# Altium PCB Drude.PcbDoc (part 2 of 2)
Units mil, origin at the board's own origin, x right, y up, seen from the top; angles counter-clockwise.
Board outline 1811.02 x 2874.02 mil, 4 copper layers (Top Layer, GND, Supply, Bottom Layer), stack 59.85 mil thick; 137 components, 118 nets, 574 pads, 296 vias.
Unrouted connection lines stored in the file: 8.
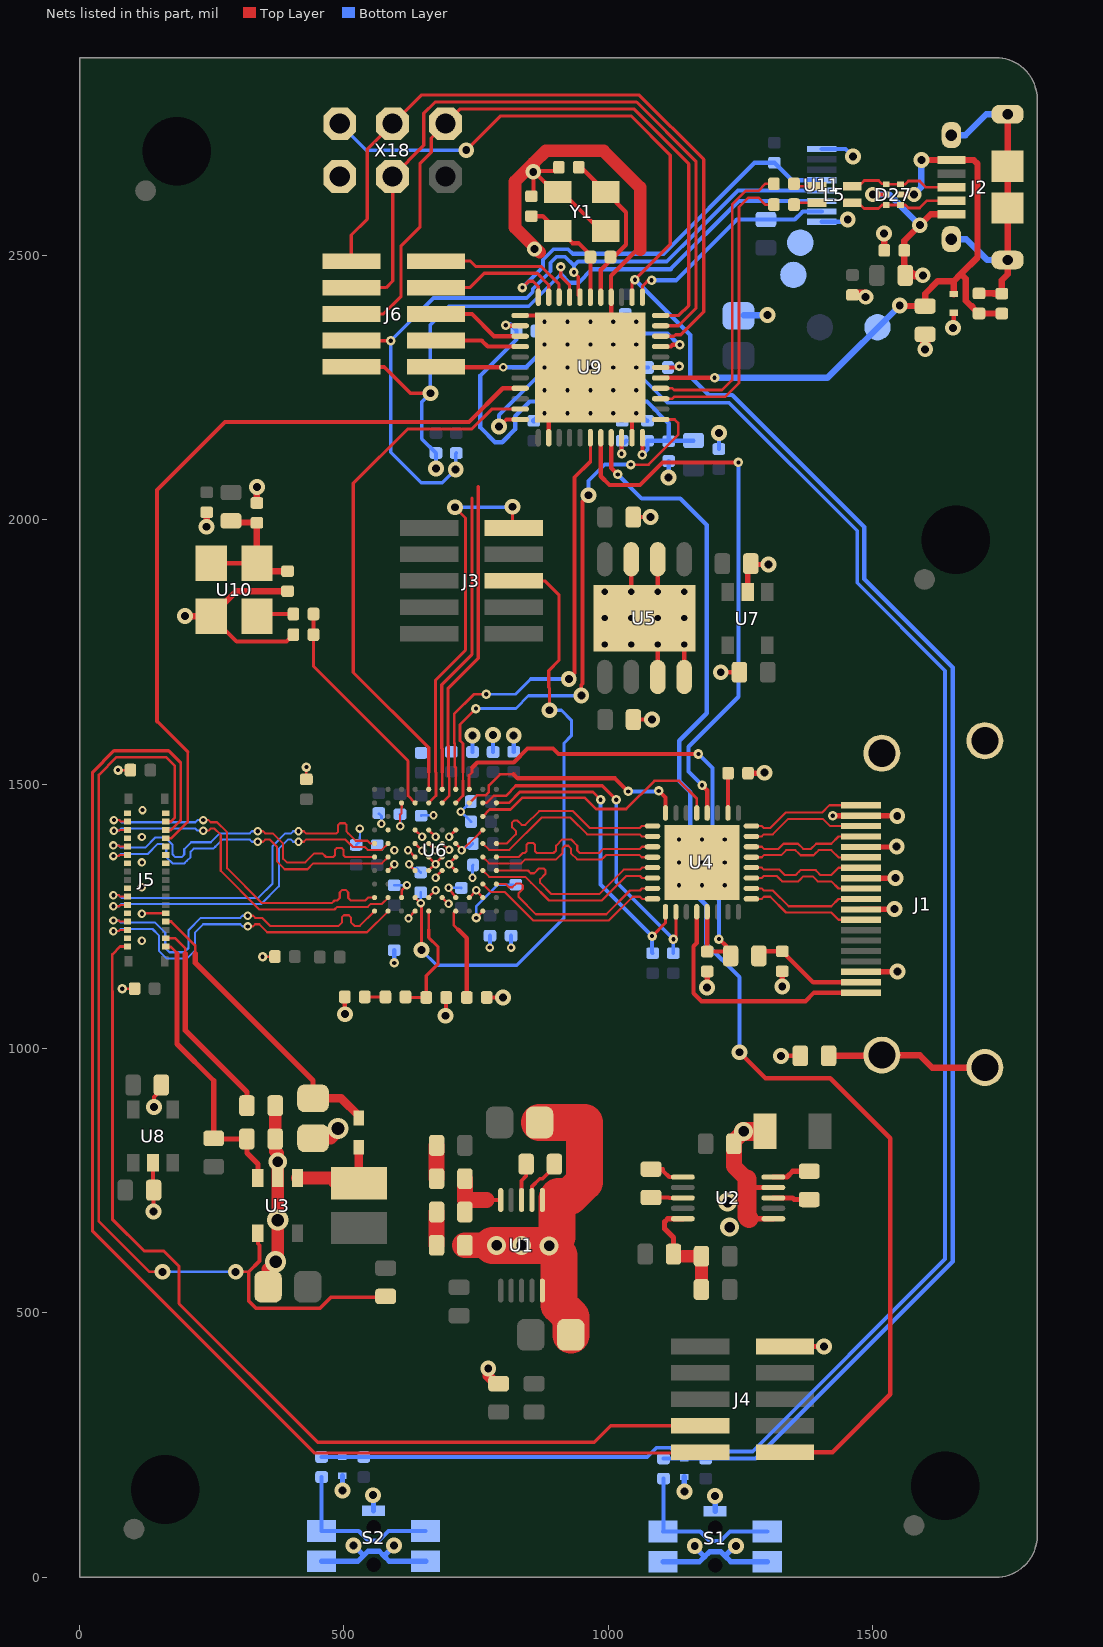
[diagram p4: the nets of this part, all layers, seen from the top]

## Via types
v1: diameter 30, hole 15, Top Layer to Bottom Layer, tented both sides, 88 vias
v2: diameter 16, hole 8, Top Layer to Bottom Layer, tented both sides, 66 vias
v3: diameter 18, hole 8, Top Layer to Bottom Layer, tented both sides, 62 vias
v4: diameter 19.68, hole 8, Top Layer to Bottom Layer, 34 vias
v5: diameter 29, hole 15, Top Layer to Bottom Layer, tented both sides, 24 vias
v6: diameter 26, hole 11.81, Top Layer to Bottom Layer, 12 vias
v7: diameter 36, hole 20, Top Layer to Bottom Layer, tented both sides, 6 vias
v8: diameter 40, hole 24, Top Layer to Bottom Layer, tented both sides, 3 vias
v9: diameter 35, hole 20, Top Layer to Bottom Layer, tented both sides, 1 vias

## Nets (pads, with @x,y where several pads share a name; then routed paths per layer and width w, separated by ;. In a path a pad name is that pad's centre, name@x,y a point inside that pad or via, vN(x,y) a via of type N, cw(c..) or ccw(c..) an arc to the next point about the centre after c; other vN are vias at no path point) (continued)
GND: C2.2 C3.2 C4.2 C5.2 C8.2 C9.2 C10.2 C11.2 C13.2 C14.2 C15.2 C16.1 C18.2 C19.2 C20.2 C21.2 C22.2 C23.2 C24.1 C25.2 C26.1 C27.1 C28.2 C29.1 C30.2 C31.1 C32.2 C33.1 C34.2 C35.1 C36.1 C37.2 C38.1 C39.2 C40.1 C41.2 C42.1 C43.1 C44.1 C45.2 C46.2 C47.1 C49.2 C50.2 C51.2 C52.2 C53.2 C54.2 C55.2 C56.2 C57.2 C58.2 C59.2 C60.2 C61.1 C62.2 C63.2 C64.2 C65.2 D2.C D3.C D13.C J1.2 J1.5 J1.8 J1.11 J1.17 J4.2 J5.3 J5.9 J5.10 J5.15 J5.21 J5.22 J5.26 J5.27 J5.33 J5.34 L4.1 L8.1 R6.1 R11.2 R12.2 R17.1 S1.3 S1.4 S1.5 S2.3 S2.4 S2.5 U1.5 U1.6 U2.1 U2.4 U3.2 U4.33 U5.3 U5.4 U5.6 U5.7 U5.9 U6.A7 U6.B2 U6.B3 U6.B4 U6.B5 U6.B6 U6.B8 U6.D4 U6.D5 U6.D6 U6.D7 U6.D9 U6.E4 U6.E5 U6.E6 U6.E7 U6.F4 U6.F5 U6.F6 U6.F7 U6.G2 U6.G4 U6.G6 U6.G7 U6.G9 U6.J8 U7.2 U8.2 U9.15 U9.23 U9.35 U9.43 U9.45 U10.2 U11.1 U11.8 X18.6 Y1.2 Y1.4 | length 7368.1
  Top Layer w4: v2@596.23,1349.41 v2@596.46,1349.41 ; v2(606.3,1420.28) 606.3,1442.3 609.02,1445.02 609.02,1456.24 ; v2(722.44,1375) 723.5,1375 736.39,1387.89 737.07,1387.89 756.68,1407.5
  Top Layer w5: v3(72.83,1526.57) C13.2@96.16,1526.57 ; v3(80.71,1113.19) C4.2@104.03,1113.19 ; v2(118,1255) 118.91,1255.91 J5.10@162.8,1255.91 ; v3(346.09,1173.51) C64.2@369.41,1173.51 ; C65.2@429,1509 v3(429,1532.32) ; U6.D9@583.43,1336.61 589.32,1342.5 ; 589.39,1342.34 v2@596.46,1349.41 ; U6.B8@609.02,1285.43 609.02,1298.98 v2(619.09,1309.06) ; 609.02,1456.24 U6.J8@609.02,1464.57 ; v2(621.06,1375) 621.82,1375 U6.E7@634.61,1362.2 ; v2(622.05,1246.06) 622.05,1247.28 U6.A7@634.61,1259.84 ; v2(623.03,1348.43) 622.8,1348.43 U6.D7@634.61,1336.61 ; U6.F7@634.61,1387.8 647.64,1374.77 v2(647.64,1374.02) ; U6.G7@634.61,1413.39 647.41,1400.59 v2(647.64,1400.59) ; U6.B6@660.2,1285.43 660.2,1286.19 v2(673.23,1299.21) ; U6.D6@660.2,1336.61 672.77,1349.18 v2@673.23,1349.18 ; U6.E6@660.2,1362.2 v2@673.23,1349.18 ; U6.F6@660.2,1387.8 673,1375 v2(673.23,1375) ; U6.G6@660.2,1413.39 673,1400.59 v2(673.23,1400.59) ; v2(673.23,1322.83) 673.23,1324.05 U6.D5@685.8,1336.61 ; U6.B5@685.8,1285.43 697.61,1273.62 v2(697.83,1273.62) ; U6.E5@685.8,1362.2 673.23,1349.64 v2@673.23,1349.18 ; U6.F5@685.8,1387.8 697.61,1375.98 v2(698.82,1375.98) ; v2(697.83,1304.13) U6.B4@711.39,1285.43 ; v2(698.82,1348.43) v2@698.82,1349.18 ; v2(698.82,1400.59) 698.82,1400.82 U6.G4@711.39,1413.39 ; U6.D4@711.39,1336.61 v2@698.82,1349.18 ; U6.E4@711.39,1362.2 698.82,1349.64 v2@698.82,1349.18 ; U6.F4@711.39,1387.8 722.44,1376.74 v2(722.44,1375) ; U6.B3@736.98,1285.43 750,1298.46 762.57,1285.89 U6.B2@762.57,1285.43 ; 756.68,1407.5 U6.G2@762.57,1413.39
  Top Layer w6: U6.D9@583.43,1336.61 U6.D9@583.66,1336.61
  Top Layer w8: U8.2@138.87,784.2 138.87,733.37 C20.2@139.96,732.28 v1(139.96,691.73) ; v1(140.75,889.76) 140.75,908.46 154.72,922.44 C21.2@154.72,931.1 ; U10.2@248.99,1817.74 297.05,1769.69 391.35,1769.69 R17.1@404.4,1782.74 ; C50.2@501.67,1097.6 501.67,1065.26 v1(501.97,1064.96) ; v1(691.93,1062.01) 693.21,1063.29 C51.2@693.21,1096.61 ; C49.2@769.98,1096.61 v1(801.02,1096.61) ; U9.23@833.13,2386.43 867.57,2386.43 v4(879.39,2374.61) v4(922.69,2331.31) v4(966,2288) ; C57.2@854.46,2611.78 858.4,2615.72 v5@858.4,2659.71 ; U9.35@887.26,2155.13 887.26,2209.26 v4(922.69,2244.69) v4(966,2288) ; C58.2@906.33,2666.6 899.44,2659.71 v5@858.4,2659.71 ; U9.45@966,2253.6 v4(966,2288) ; Y1.2@995.25,2546.14 985.75,2546.14 912.33,2619.56 898.55,2619.56 v5@858.4,2659.71 ; U5.7@1043.32,1925.22 v6(1043.32,1864) 1043.32,1839 U5.9@1068.32,1814 ; U9.43@1044.74,2155.13 1044.74,2209.26 v4(1009.31,2244.69) v4(966,2288) ; C2.2@1047.09,2005 v1(1079.65,2005) ; C3.2@1047.44,1622.05 v1(1082.68,1622.05) ; 1060.17,2512.35 1056.06,2512.35 1005,2461.28 1005,2421.24 U9.15@1005.37,2420.87 1005.37,2327.37 v4(966,2288) ; U5.3@1093.32,1702.78 v6(1093.32,1764) U5.9@1093.32,1789 ; U5.6@1093.32,1925.22 v6(1093.32,1864) 1093.32,1839 U5.9@1068.32,1814 ; U5.4@1143.32,1702.78 v6(1143.32,1764) 1118.32,1764 U5.9@1093.32,1789 ; v1(1212.6,1711.61) C19.2@1247.83,1711.61 ; 1265.75,678.15 1273.62,678.15 ; v1(1326.77,986.22) L8.1@1362.99,986.22 ; v1(1452.72,2567.67) v1@1455.71,2564.68 ; v1(1652,2363) 1654,2363 1653,2364 D3.C@1653,2391.28 ; U5.9@1068.32,1814 U5.9@1093.32,1789
  Top Layer w10: v1(1186.87,1115.29) C23.2@1186.87,1145.76 ; v1(1201.83,153.55) v1@1201.83,154.47 ; 1261.81,752.95 1277.56,737.2 U2.4@1312.01,737.2 ; U7.2@1263.48,1863.19 1263.48,1911.22 C18.2@1269.25,1916.99 1270.89,1915.35 v1(1303.15,1915.35) ; C22.2@1264.08,1520.67 1294.29,1520.67 v1(1295.28,1521.65) ; 1273.62,678.15 1286.37,678.15 U2.1@1312.01,678.15 ; v1(1328.87,1116.99) C24.1@1328.87,1146.06 ; J4.2@1333.86,436.61 v1(1408.07,436.61) ; v3(1424.32,1440.32) J1.2@1477.75,1440.32 1545.9,1440.32 v1(1546.26,1439.96) ; J1.17@1477.75,1145.05 1547.61,1145.05 v1(1546.98,1145.67) ; J1.11@1477.75,1263.16 1540.72,1263.16 v1(1541.34,1263.78) ; J1.8@1477.75,1322.21 1542.69,1322.21 v1(1543.31,1322.83) ; J1.5@1477.75,1381.27 1544.65,1381.27 v1(1545.28,1381.89)
  Top Layer w12: v1(199.3,1817.74) U10.2@248.99,1817.74 296.29,1865.04 C47.1@393.3,1865.04 ; v1(240.3,1986.74) C44.1@240.3,2014.04 ; C46.2@335.3,2031.74 v1(335.3,2061.74) ; v1(1521,2541) 1521,2536 1521.97,2535.03 C61.1@1521.97,2509.39
  Top Layer w20: v1(772.83,394.61) 772.42,394.19 772.42,381.24 787.4,366.26 C14.2@792.52,366.26 ; C62.2@1461.67,2425.14 1486.67,2425.14 v5(1486.67,2421.14) ; v5(1599,2322.31) L4.1@1599,2350.54
  Top Layer w24: C11.2@356.39,549.46 356.39,582.46 374.71,600.77 v8(374.71,675.44) U3.2@374.71,755.17 v9(374.71,785.68) 374.71,801.58 369.99,806.3 R12.2@369.99,828.99 R11.2@369.99,891.98 ; C9.2@441.64,830.35 474.64,830.35 488.89,844.6 v8(488.89,848.66) ; v5@858.4,2659.71 858.4,2674.47 ; v5@870.1,2506.14 823.46,2552.78 823.46,2639.54 858.4,2674.47 ; 1060.17,2511.17 1060.17,2628.5 991.08,2697.6 881.53,2697.6 858.4,2674.47
  Top Layer w30: v7(1255.91,843.5) 1237.4,825 C5.2@1237.4,819.88 1237.4,777.36 1261.81,752.95
  Top Layer w36: v7(1255.91,843.5) C8.2@1296.26,843.5 ; 1261.81,752.95 1261.81,682.09 1265.75,678.15
  Top Layer w48: R6.1@728.74,627.87 v7@780.71,627.87
  Top Layer w70: v7@780.71,627.87 v7(788.58,627.87) v7(835.83,627.87) v7@887.01,627.87 ; C10.2@869.89,860.16 954.6,860.16 954.6,747.75 926.58,719.73 905.81,719.73 902.43,716.35 902.43,643.29 v7@887.01,627.87 ; C45.2@928.94,458.58 928.94,492.55 906.54,514.95 906.54,608.34 v7(887.99,626.89) v7@887.01,627.87
  Bottom Layer w4: 530,1399.36 v2(530,1416) ; v2(570.87,1425.01) v2@570.87,1429.94 ; v2(606.3,1420.28) 606.3,1428.64 ; 610.36,1309.06 v2(619.09,1309.06) ; v2(623.03,1348.43) 630.23,1341.23 630.31,1341.23 ; v2@661.36,1440.94 v2(669.29,1440.94) ; v2(697.83,1304.13) 706.64,1304.13 ; v2(722.44,1375) 728.44,1381 729.5,1381 ; 727.63,1454.62 v2(721.01,1447.98) 721.32,1447.98 727.92,1441.38 ; v2(743.11,1322.83) 743.11,1331.64
  Bottom Layer w5: C28.2@523,1385 530,1392 530,1399.36 ; C27.1@566,1444.3 570.87,1439.43 v2@570.87,1429.94 ; C38.1@595,1308.7 595.36,1309.06 610.36,1309.06 ; C25.2@606,1443 606.3,1442.7 606.3,1428.64 ; 630.31,1341.23 636.77,1341.23 C52.2@645,1333 ; C42.1@646,1440.3 646.64,1440.94 v2@661.36,1440.94 ; 706.64,1304.13 721.57,1304.13 C26.1@722,1303.7 ; 727.63,1454.62 C30.2@740.01,1467 ; 727.92,1441.38 C31.1@740.3,1429 ; 729.5,1381 737.07,1381 C36.1@743.87,1387.8 ; 743.11,1331.64 743.11,1346.11 C34.2@744,1347
  Bottom Layer w8: v3(595,1162) C37.2@595,1186 ; C40.1@743,1560.7 v1(743,1592) ; v2(775.59,1190.94) 776,1191.35 C35.1@776,1213.3 ; C16.1@782,1560.7 v1(782,1593) ; v2(815.94,1190.94) 815.94,1213.24 C33.1@816,1213.3 ; C15.2@821,1561 v1(821,1592) ; v4@873.39,2201.39 v4(879.39,2201.39) ; v4(1009.31,2201.39) 1023.69,2187 C55.2@1026,2187 ; v4@1045.39,2374.61 v4@1046.39,2374.61 ; v4(1052.61,2288) C32.2@1075,2288 ; v4@1061.17,2198.83 1073,2187 C59.2@1074,2187 ; v1(1114,2080) C60.2@1114,2111 ; C43.1@1209,2133.7 v1(1209,2164) ; U11.8@1403.54,2563.39 1448.44,2563.39 v1(1452.72,2567.67) ; U11.1@1403.54,2701.18 1448.43,2701.18 v1(1462.6,2687.01) ; v4@1046.39,2374.61 v4(1052.61,2374.61) 1038.23,2389 C54.2@1032,2389 v4@1046.39,2374.61
  Bottom Layer w10: S2.4@457.57,30.35 526.43,30.35 537.4,41.32 ; v1(497.05,164.37) D2.C@497.05,191.93 ; v1(517.74,60.04) 518.68,60.04 537.4,41.32 ; v1(555.12,155.31) v1@556,154.43 ; S2.5@556,125.82 v1@556,149.5 ; v1(594.49,60.04) 594.49,58.83 575.79,40.13 ; S2.3@654.43,30.35 585.57,30.35 575.79,40.13 ; C53.2@859,2187 v4@873.39,2201.39 ; S1.4@1103.57,29.35 1172.43,29.35 1182.09,39 ; v1(1143.7,162.4) D13.C@1143.7,189.96 ; v1(1163.39,59.06) 1163.39,57.7 1182.09,39 ; v1(1201.83,153.55) 1201.83,155.11 v1@1202.98,156.27 ; S1.5@1202,124.82 v1@1202,150.36 ; v1(1241.2,59.06) 1241.05,59.06 1240.16,59.95 1220.56,40.35 ; S1.3@1300.43,29.35 1231.57,29.35 1220.56,40.35 ; 537.4,41.32 545.32,49.24 566.68,49.24 575.79,40.13 ; 1182.09,39 1191.32,48.24 1212.68,48.24 1220.56,40.35
  Bottom Layer w12: C63.2@1256,2387 v1(1301,2387)
  Bottom Layer w24: v8(488.89,848.66) v8@492.81,848.66
  other v2: 118,1204 750,1299.21 118,1305 595.47,1348.43 673.23,1348.43 118,1352 595.47,1375 118,1400 119,1451
  other v4: 1133.69,1308.69 1177,1308.69 1220.31,1308.69 1133.69,1352 1177,1352 1220.31,1352 1133.69,1395.31 1177,1395.31 1220.31,1395.31 922.69,2201.39 966,2201.39 1052.61,2201.39 879.39,2244.69 966,2244.69 1052.61,2244.69 879.39,2288 922.69,2288 1009.31,2288 879.39,2331.31 966,2331.31 1009.31,2331.31 1052.61,2331.31 922.69,2374.61 966,2374.61 1009.31,2374.61
  other v5: 860.28,2511.93 858,2658
  other v6: 993.32,1764 1043.32,1764 993.32,1814 1043.32,1814 1093.32,1814 1143.32,1814 993.32,1864 1143.32,1864
  other v7: 1229.33,662.4 1225.39,709.65
  other v8: 370.77,596.7
HDMI_CK_N: U4.8 U6.C2 | length 369.7
  Top Layer w4: U6.C2@762.57,1311.02 777.24,1296.35 803.68,1296.35 858.03,1242 1001,1242 1045.94,1286.94 1059.89,1286.94 1063.73,1283.1 U4.8@1083.5,1283.1
HDMI_CK_P: U4.7 U6.C1 | length 368.8
  Top Layer w4: U6.C1@788.16,1311.02 805.98,1311.02 812,1305 818.58,1305 825.52,1311.94 834.59,1311.94 838.03,1308.49 838.03,1301.82 830.03,1293.82 830.03,1286.97 863,1254 996.03,1254 1040.97,1298.94 1059.89,1298.94 1063.73,1302.79 U4.7@1083.5,1302.79
HDMI_CON_CK_N: J1.12 U4.17 | length 226.8
  Top Layer w4: U4.17@1270.5,1283.1 1290.27,1283.1 1294.11,1286.94 1306.06,1286.94 1335.84,1257.16 1421.66,1257.16 1435.35,1243.47 J1.12@1477.75,1243.47
HDMI_CON_CK_P: J1.10 U4.18 | length 226.8
  Top Layer w4: U4.18@1270.5,1302.79 1290.27,1302.79 1294.11,1298.94 1311.03,1298.94 1340.81,1269.16 1421.66,1269.16 1435.35,1282.84 J1.10@1477.75,1282.84
HDMI_CON_D0_N: J1.9 U4.19 | length 226.4
  Top Layer w4: U4.19@1270.5,1322.47 1290.27,1322.47 1294.11,1326.31 1318.69,1326.31 1325.27,1319.73 1328.79,1316.21 1359.18,1316.21 1362.7,1319.73 1368.49,1325.51 1386.7,1325.51 1396,1316.21 1421.66,1316.21 1435.35,1302.53 J1.9@1477.75,1302.53
HDMI_CON_D0_P: J1.7 U4.20 | length 226.4
  Top Layer w4: U4.20@1270.5,1342.16 1290.27,1342.16 1294.11,1338.31 1323.66,1338.31 1333.76,1328.21 1354.21,1328.21 1360,1334 1363.51,1337.51 1391.67,1337.51 1395.18,1334 1400.97,1328.21 1421.66,1328.21 1435.35,1341.9 J1.7@1477.75,1341.9
HDMI_CON_D1_N: J1.6 U4.21 | length 226.6
  Top Layer w4: U4.21@1270.5,1361.84 1290.27,1361.84 1294.11,1365.68 1326.66,1365.68 1336.24,1375.27 1353.73,1375.27 1360,1369 1363.51,1365.49 1388.19,1365.49 1391.7,1369 1397.97,1375.27 1421.66,1375.27 1435.35,1361.58 J1.6@1477.75,1361.58
HDMI_CON_D1_P: J1.4 U4.22 | length 226.6
  Top Layer w4: U4.22@1270.5,1381.53 1290.27,1381.53 1294.11,1377.68 1321.68,1377.68 1331.27,1387.27 1358.7,1387.27 1368.49,1377.49 1383.22,1377.49 1393,1387.27 1421.66,1387.27 1435.35,1400.95 J1.4@1477.75,1400.95
HDMI_CON_D2_N: J1.3 U4.23 | length 226.6
  Top Layer w4: U4.23@1270.5,1401.21 1290.27,1401.21 1294.11,1405.06 1311.03,1405.06 1340.29,1434.32 1405.68,1434.32 1419.36,1420.64 J1.3@1477.75,1420.64
HDMI_CON_D2_P: J1.1 U4.24 | length 226.6
  Top Layer w4: U4.24@1270.5,1420.9 1290.27,1420.9 1294.11,1417.06 1306.06,1417.06 1335.32,1446.32 1404.32,1446.32 1418.01,1460.01 J1.1@1477.75,1460.01
HDMI_D0_N: U4.6 U6.D2 | length 365.2
  Top Layer w4: U6.D2@762.57,1336.61 774.57,1324.61 843,1324.61 854,1313.61 887.61,1280 987.66,1280 1006.83,1299.17 1033.97,1326.31 1059.89,1326.31 1063.73,1322.47 U4.6@1083.5,1322.47
HDMI_D0_P: U4.5 U6.D1 | length 369.9
  Top Layer w4: U6.D1@788.16,1336.61 847.97,1336.61 853,1331.58 859.58,1331.58 868.52,1340.52 877.59,1340.52 881.03,1337.08 881.03,1330.4 871.03,1320.4 871.03,1313.56 892.58,1292 982.69,1292 1029,1338.31 1059.89,1338.31 1063.73,1342.16 U4.5@1083.5,1342.16
HDMI_D1_N: U4.4 U6.E2 | length 365.8
  Top Layer w4: U6.E2@762.57,1362.2 774.57,1350.2 835.44,1350.2 842.94,1357.71 901.23,1357.71 913.14,1369.62 913.14,1378.62 918.03,1383.5 924.26,1383.5 929.14,1378.62 929.14,1369.62 941.06,1357.71 987.63,1357.71 991.14,1361.22 995.61,1365.68 1059.04,1365.68 1062.88,1361.84 U4.4@1083.5,1361.84
HDMI_D1_P: U4.3 U6.E1 | length 365.8
  Top Layer w4: U6.E1@788.16,1362.2 830.47,1362.2 837.97,1369.71 842,1369.71 845.2,1372.91 845.2,1385.51 848.4,1388.71 858,1388.71 861.2,1385.51 861.2,1372.91 864.4,1369.71 896.26,1369.71 901.14,1374.59 901.14,1383.59 913.06,1395.5 929.23,1395.5 941.14,1383.59 941.14,1374.59 946.03,1369.71 982.66,1369.71 990.64,1377.68 1059.89,1377.68 1063.73,1381.53 U4.3@1083.5,1381.53
HDMI_D2_N: U4.2 U6.F2 | length 366.1
  Top Layer w4: U6.F2@762.57,1387.8 774.57,1375.8 812.8,1375.8 874,1437 928.03,1437 959.97,1405.06 1059.04,1405.06 1062.88,1401.21 U4.2@1083.5,1401.21
HDMI_D2_P: U4.1 U6.F1 | length 365.2
  Top Layer w4: U6.F1@788.16,1387.8 807.82,1387.8 825.03,1405 825.03,1411.58 818.09,1418.52 818.09,1427.59 821.54,1431.03 828.21,1431.03 836.21,1423.03 843.06,1423.03 869.03,1449 933,1449 964.94,1417.06 1059.04,1417.06 1062.88,1420.9 U4.1@1083.5,1420.9
I2C_SCL: J6.7 R33.1 U6.J5 U9.18 U11.5 | length 2125.5
  Top Layer w5: U6.J5@685.8,1464.57 699,1477.77 699,1513 697.83,1514.17
  Top Layer w6: 697.83,1514.17 697.83,1572.11 697,1572.95 697,1681.25 753.94,1738.19 753.94,2062.65 ; v3(935,2468) 943,2460 943,2424.19 U9.18@946.32,2420.87
  Top Layer w7: J6.7@514.08,2339 514.5,2338.58 v3(588.58,2338.58)
  Bottom Layer w7: R33.1@712.39,2126.1 711.31,2125.02 v1(711.31,2095.24) 686.06,2070 646,2070 588.58,2127.42 v3(588.58,2338.58) 669.5,2419.5 845.53,2419.5 856.96,2430.92 856.96,2436.38 890.5,2469.92 890.5,2486.08 901.92,2497.5 918.08,2497.5 935,2480.58 ; v3(935,2468) 935,2480.58 ; 1140,2518 1110.36,2488.36 942.78,2488.36 935,2480.58
  Bottom Layer w8: 1140.35,2517.65 1245.15,2622.44 U11.5@1403.54,2622.44
I2C_SDA: J6.9 R21.1 U6.K5 U9.19 U11.6 | length 1963.4
  Top Layer w5: U6.K5@685.8,1490.16 685.8,1522
  Top Layer w6: 685.8,1522 685.8,1567.18 685,1567.98 685,1687.95 741.94,1744.89 741.94,2040.7 ; v3(910,2478) 910,2460.38 926.63,2443.75 U9.19@926.63,2420.87
  Top Layer w7: J6.9@514.08,2289 576.16,2289 625.98,2239.17 v1(663.39,2239.17) ; v1(673.89,2097.24) v1@673.89,2098.85
  Bottom Layer w7: v1(673.89,2097.24) 673.89,2125.99 647,2152.88 647,2222.79 v1(663.39,2239.17) 663.39,2368.11 698.82,2403.54 849.38,2403.54 910,2464.17 v3(910,2478)
  Bottom Layer w8: 910,2464.17 926.17,2448 943.28,2448 969.14,2473.86 1117.78,2473.86 1246.68,2602.76 U11.6@1403.54,2602.76
INT: R22.1 U9.12 U11.7 | length 418.3
  Top Layer w6: U9.12@1064.43,2420.87 1064.43,2441.17 1069.25,2445.99 1069.25,2446.25 1075.76,2452.76 v3(1081.69,2452.76)
  Bottom Layer w8: v3(1081.69,2452.76) 1127.95,2452.76 1242.97,2567.77 R22.1@1298,2567.77 1352.46,2567.77 1367.76,2583.07 U11.7@1403.54,2583.07
IR: J3.2 U6.J6 | length 747.9
  Top Layer w5: U6.J6@660.2,1464.57 674,1478.36 674,1522 673,1523
  Top Layer w6: 673,1523 673,1696.62 729.94,1753.56 729.94,2003.33 v1(709.65,2023.62) ; v1(818.9,2024.61) 818.9,1986.45 J3.2@820.92,1984.43
  Bottom Layer w7: v1(709.65,2023.62) 817.91,2023.62 v1(818.9,2024.61)
LANE0_N: J5.11 U6.F9 | length 657.3
  Top Layer w4: v2(64,1269) 75,1269 77.65,1271.65 J5.11@90.75,1271.65 ; v2(414,1391) 424,1391 428,1395 503.03,1395 517.03,1381 539.59,1381 544.8,1375.8 571.43,1375.8 U6.F9@583.43,1387.8
  Bottom Layer w4: v2(64,1269) 74,1269 78,1273 343,1273 377,1307 377,1378.03 393.97,1395 400,1395 404,1391 v2(414,1391)
LANE0_P: J5.13 U6.F10 | length 657.9
  Top Layer w4: v2(64,1290) 74,1290 76.6,1287.4 J5.13@90.75,1287.4 ; v2(414,1411) 424,1411 428,1407 485.8,1407 489,1410.2 489,1422.8 492.2,1426 501.8,1426 505,1422.8 505,1410.2 508.2,1407 ; 508,1407 522,1393 544.56,1393 549.77,1387.8 U6.F10@557.84,1387.8
  Bottom Layer w4: v2(64,1290) 74,1290 79,1285 338.03,1285 365,1311.97 365,1383 389,1407 400,1407 404,1411 v2(414,1411)
LANE1_N: J5.23 U6.E9 | length 659.5
  Top Layer w4: v2(64,1364) 74,1364 76.14,1366.14 J5.23@90.75,1366.14 ; v2(337,1391) 347,1391 351,1395 360.03,1395 373,1382.03 373,1354 388,1339 431,1339 442.2,1350.2 571.43,1350.2 U6.E9@583.43,1362.2
  Bottom Layer w4: v2(64,1364) 74,1364 78,1368 128.97,1368 147.97,1387 157.03,1387 164,1380.03 164,1362.03 176.03,1350 198,1350 202.97,1354.97 210,1362 210,1372.03 215.97,1378 253,1378 256.51,1381.51 270,1395 322,1395 326,1391 v2(337,1391)
LANE1_P: J5.25 U6.E10 | length 659.8
  Top Layer w4: v2(64,1384) 74,1384 76.11,1381.89 J5.25@90.75,1381.89 ; v2(337,1411) 347,1411 351,1407 365,1407 385,1387 385,1358.97 391.97,1352 427.03,1352 444.03,1369 459.2,1369 466,1362.2 479.8,1362.2 483,1365.4 483,1375.8 486.2,1379 495.8,1379 499,1375.8 499,1365.4 502.2,1362.2 U6.E10@557.84,1362.2
  Bottom Layer w4: v2(64,1384) 74,1384 78,1380 124,1380 143,1399 162,1399 176,1385 176,1367 181,1362 193.03,1362 198,1366.97 198,1377 211,1390 248.03,1390 265.03,1407 322,1407 326,1411 v2(337,1411)
LANE2_N: J5.29 U6.B9 | length 662.2
  Top Layer w4: v2(65,1412) 75,1412 76.39,1413.39 J5.29@90.75,1413.39 ; v2(234,1412) 244,1412 248,1416 255,1416 267,1404 267,1336.03 340.03,1263 482.2,1263 487.2,1268 544.97,1268 549.97,1273 571,1273 U6.B9@583.43,1285.43
  Bottom Layer w4: v2(65,1412) 75,1412 79,1416 219,1416 223,1412 v2(234,1412)
LANE2_P: J5.31 U6.B10 | length 661.1
  Top Layer w4: v2(65,1432) 75,1432 77.87,1429.13 J5.31@90.75,1429.13 ; v2(234,1432) 244,1432 248,1428 259.97,1428 279,1408.97 279,1341 345,1275 477.23,1275 482.23,1280 487.2,1280 492,1284.8 492,1295.2 496.8,1300 503.2,1300 508,1295.2 508,1284.8 512.8,1280 540,1280 545.43,1285.43 U6.B10@557.84,1285.43
  Bottom Layer w4: v2(65,1432) 75,1432 79,1428 219,1428 223,1432 v2(234,1432)
LANE3_N: J5.5 U6.A9 | length 661.9
  Top Layer w4: v2(64,1222) 74,1222 76.41,1224.41 J5.5@90.75,1224.41 ; v2(318,1231) 328,1231 332,1235 340,1235 355,1220 543.59,1220 U6.A9@583.43,1259.84
  Bottom Layer w4: v2(64,1222) 74,1222 78.06,1226.06 137.94,1226.06 150,1214 150,1185 165,1170 202.97,1170 218,1185.03 218,1219 234,1235 304,1235 308,1231 v2(318,1231)
LANE3_P: J5.7 U6.A10 | length 658.9
  Top Layer w4: v2(63.98,1242.13) 73.98,1242.13 75.94,1240.16 J5.7@90.75,1240.16 ; v2(318,1251) 328,1251 332,1247 345,1247 360,1232 490,1232 496,1238 496,1248 500,1252 509,1252 513,1248 513,1239 520,1232 530,1232 U6.A10@557.84,1259.84
  Bottom Layer w4: v2(63.98,1242.13) 73.98,1242.13 78.04,1238.06 142.91,1238.06 162,1218.97 162,1189.97 169.97,1182 198,1182 206,1190 206,1223.97 229.03,1247 304,1247 308,1251 v2(318,1251)
LCD-ID-DET1: J5.24
LED-A: C9.1 D1.C J5.8 | length 561.5
  Top Layer w5: J5.8@162.8,1240.16 173.23,1240.16 218.5,1194.88 218.5,1178.13
  Top Layer w10: 218.5,1179.13 218.5,1162.4 441.64,939.27 C9.1@441.64,905.76
  Top Layer w16: C9.1@441.64,905.76 494.85,905.76 528.25,872.35 D1.C@528.25,868.35
LED-K1: J5.2 R10.1 R12.1 U3.3 | length 551.4
  Top Layer w5: J5.2@162.8,1191.91 172.69,1191.91 184.06,1180.55 184.06,1178.13
  Top Layer w10: 184.06,1179.13 184.06,1008.57 253.65,938.98 R10.1@253.65,830.16 ; R10.1@253.65,828.99 R12.1@316.44,828.99 316.44,802.65 337.31,781.79 U3.3@337.31,755.17
LED-K2: J5.4 R11.1 | length 390.5
  Top Layer w5: J5.4@162.8,1208.66 180.12,1208.66 200.06,1188.72 ; 200.06,1178.13 200.06,1187.72
  Top Layer w10: 200.06,1179.13 200.06,1034.2 316.44,917.81 R11.1@316.44,891.98
LED-PWM: J5.32 R13.2 U3.4 | length 1861.3
  Top Layer w5: v1(156.5,577.76) 131.89,577.76 36.42,673.23 36.42,1517.72 69.88,1551.18 163.39,1551.18 180.12,1534.45 180.12,1436.57 172.69,1429.13 ; v1(295.28,577.76) 319.87,577.76
  Top Layer w6: J5.32@162.8,1429.13 172.69,1429.13
  Top Layer w7: U3.4@337.31,650.83 337.31,631.1 340.27,628.14 340.27,598.15 319.89,577.78 319.89,522.72 333.66,508.96 454.53,508.96 475.36,529.79 R13.2@578.74,529.79
  Bottom Layer w5: v1(156.5,577.76) v1(295.28,577.76)
NetC1_1: C1.1 U1.7 | length 88.7
  Top Layer w7: U1.7@855.51,713.5 855.51,739.14 870.23,753.86 875.59,753.86 898.03,776.3 C1.1@898.03,781.42
NetC1_2: C1.2 U1.8 | length 71.5
  Top Layer w7: U1.8@835.83,713.5 835.83,750.07 844.49,758.73 C1.2@844.49,781.42
NetC6_1: C6.1 U2.3 | length 69.2
  Top Layer w10: U2.3@1312.01,717.52 1348.43,717.52 1351.57,714.37 C6.1@1379.92,714.37
NetC6_2: C6.2 U2.5 | length 72.5
  Top Layer w10: U2.5@1312.01,756.89 1337.65,756.89 1348.67,767.91 C6.2@1379.92,767.91
NetC7_1: C7.1 U2.8 | length 60.4
  Top Layer w8: C7.1@1080.71,718.31 1114.32,718.31 1115.11,717.52 U2.8@1140.75,717.52
NetC7_2: C7.2 U2.6 | length 68.1
  Top Layer w8: C7.2@1080.71,771.85 1103.39,771.85 1103.39,768.61 1115.11,756.89 U2.6@1140.75,756.89
NetC12_1: C12.1 R7.2 R8.2 U2.10 | length 201.8
  Top Layer w10: R7.2@1123.23,611.22 1123.23,642.52 1106.3,659.45 1106.3,672.24 1112.2,678.15 U2.10@1140.75,678.15
  Top Layer w24: 1142.05,607.28 R8.2@1175.98,607.28 1175.98,584.6 C12.1@1175.98,544.29
NetC22_1: C22.1 U4.26 | length 75.2
  Top Layer w8: U4.26@1226.21,1445.5 1226.21,1520.5 C22.1@1226.38,1520.67
NetC23_1: C23.1 L3.1 U4.13 U6.K3 | length 1009.3
  Top Layer w5: U6.K3@736.98,1490.16 736.5,1490.63 736.5,1516.5 742,1522
  Top Layer w6: 742,1522 742,1531
  Top Layer w8: 742,1531 752,1541 821,1541 847.34,1567.34 895.26,1567.34 905.6,1557 v3(1170.36,1557) ; C23.1@1186.87,1183.46 L3.1@1222.84,1183.46 ; C23.1@1186.84,1183.5 U4.13@1186.84,1258.5 ; v3(1209,1207) 1209.46,1207 1222.84,1193.62 L3.1@1222.84,1183.46 ; L3.1@1231.1,1175.2 L3.1@1222.84,1183.46
  Bottom Layer w8: v3(1170.36,1557) 1196.69,1530.68 1196.69,1293.31 1209,1281 v3(1209,1207)
NetC24_2: C24.2 J1.18 L3.2 | length 220.8
  Top Layer w8: L3.2@1284.65,1175.2 1293.21,1183.76 C24.2@1328.87,1183.76 1387.27,1125.36 J1.18@1477.75,1125.36
NetC32_1: C32.1 U9.6 | length 49.8
  Top Layer w8: U9.6@1098.87,2288 1132,2288 v3(1134,2290)
  Bottom Layer w8: C32.1@1119.54,2290 v3@1128.7,2290 ; v3@1129.7,2291 1130.7,2290 v3(1134,2290)
NetC46_1: C46.1 C47.2 L6.1 U10.1 U10.4 | length 271.1
  Top Layer w8: U10.1@248.99,1917.74 334.99,1917.74 U10.4@335.3,1918.05
  Top Layer w12: L6.1@286.3,1997.97 L6.1@290.23,1994.04 ; L6.1@297.6,1994.74 335.3,1994.74 C46.1@335.3,1994.04 ; C46.1@335.6,1993.74 C46.1@335.3,1994.04 ; C47.2@393.3,1902.74 350.61,1902.74 U10.4@335.61,1917.74 335.3,1918.05 C46.1@335.3,1994.04
NetC49_1: C49.1 U6.A4 | length 175.1
  Top Layer w5: U6.A4@711.39,1259.84 707.5,1255.96 707.5,1233.5 716,1225
  Top Layer w8: 716,1225 732.28,1208.72 C49.1@732.28,1096.61
NetC50_1: C50.1 R18.2 | length 39.1
  Top Layer w6: C50.1@539.37,1097.6 R18.2@578.44,1097.6
NetC51_1: C51.1 R18.1 U6.A6 | length 219.5
  Top Layer w5: 660.2,1225 U6.A6@660.2,1259.84
  Top Layer w6: R18.1@616.34,1097.6 617.32,1096.61 C51.1@655.51,1096.61 655.51,1137.8 678,1160.28 678,1192 660.2,1209.8 660.2,1225
NetC55_1: C55.1 U9.42 | length 58.2
  Top Layer w8: v3(1025,2125) 1025.06,2125.06 U9.42@1025.06,2155.13
  Bottom Layer w8: v3(1025,2125) 1025,2140.31 C55.1@1034,2149.31
NetC56_1: C56.1 C59.1 C60.1 L2.1 U9.24 U9.44 | length 881
  Top Layer w8: v3(806,2368) 806,2367 806.26,2366.74 U9.24@833.13,2366.74 ; v3@1064.43,2123.03 U9.44@1064.43,2155.13
  Bottom Layer w8: v3(806,2368) 810.63,2368 811.63,2367 814.47,2369.83 826.3,2358 C56.1@826.3,2357 826.3,2341.06 757.87,2272.64 757.87,2174.21 785.43,2146.65 799.21,2146.65 823.82,2171.26 823.82,2195.87 851.38,2223.43 1072.83,2223.43 1114,2182.26 C60.1@1114,2149.3 ; v3(1063.98,2123.03) 1074,2133.06 C59.1@1074,2149.3 C60.1@1114,2149.3 ; C60.1@1114,2148.7 C60.1@1114,2149.3 ; L2.1@1161,2149.3 C60.1@1114,2149.3
NetC57_1: C57.1 R72.1 U9.17 Y1.1 | length 222.9
  Top Layer w8: C57.1@854.46,2574.08 876.03,2574.08 Y1.1@903.97,2546.14 908.97,2546.14 932.1,2523.02 943.64,2523.02 968.79,2497.87 R72.1@968.79,2496.87 ; U9.17@966,2420.87 R72.1@966,2496.87
NetC58_1: C58.1 R72.2 U9.16 Y1.3 | length 304.8
  Top Layer w8: C58.1@944.03,2666.6 948.21,2666.6 Y1.3@995.25,2619.56 1033.25,2581.56 1033.25,2520.17 985.69,2472.6 U9.16@985.69,2420.87
NetC61_2: C61.2 D27.5 J2.1 L7.2 | length 356.3
  Top Layer w8.1: v5@1500,2616 1503,2616 1503,2615 D27.5@1525.73,2615
  Top Layer w12: L7.2@1561.44,2462.14 1579.01,2462.14 1559.67,2481.48 C61.2@1559.67,2509.39 1559.67,2527.67 v1(1589,2557) 1609.82,2577.82 J2.1@1648.7,2577.82
  Top Layer w16: 1579.01,2462.14 v5(1594.67,2462.14)
  Bottom Layer w12: v5(1500,2615) 1531,2615 v1(1589,2557)
NetD1_A: D1.A L1.2 U3.1 | length 188.1
  Top Layer w16: L1.2@528.25,745.32 D1.A@528.25,813.24
  Top Layer w24: U3.1@412.11,755.17 475.15,755.17 484.99,745.32 L1.2@528.25,745.32
NetJ1_19: J1.19 U4.12 | length 486.5
  Top Layer w8: U4.12@1167.16,1258.5 1167.16,1199.73 1160.87,1193.44 1160.87,1104.52 1176.1,1089.29 1372.76,1089.29 1389.14,1105.68 J1.19@1477.75,1105.68
NetJ1_20: J1.20 J1.21 J1.22 J1.23 L8.2 | length 305.8
  Top Layer w12: L8.2@1416.54,986.22 1515.77,986.22 J1.20@1517.12,987.57 1589.2,987.57 1612.83,963.94 J1.22@1712,963.94
NetJ4_7: J4.7 J5.1 | length 1876.8
  Top Layer w5: 62.01,1108.27 62.01,1178.15 76.77,1192.91 J5.1@90.75,1192.91
  Top Layer w6: 62.01,1108.27 62.01,677.17 122.05,617.13 159.45,617.13 187.99,588.58 187.99,517.72 450.11,255.59 973.43,255.59 1004.44,286.61 J4.7@1174.02,286.61
NetJ4_9: J4.9 J5.30 | length 2528.8
  Top Layer w5: J5.30@162.8,1413.39 172.69,1413.39 190.94,1431.65 190.94,1431.84 191.12,1432.01 191.12,1540.18
  Top Layer w6: 191.12,1540.18 168.31,1562.99 64.96,1562.99 24.61,1522.64 24.61,654.53 443.9,235.24 1172.64,235.24 J4.9@1174.02,236.61
NetJ4_10: J4.10 U9.41 | length 2430
  Top Layer w8: U9.41@1005.37,2155.13 1005.37,2097.98 v3(1017.72,2085.63) ; v1(1248,993) 1297.1,943.9 1419.64,943.9 1533.15,830.39 1533.15,346.14 1423.62,236.61 J4.10@1333.86,236.61
  Bottom Layer w8: v3(1017.72,2085.63) 1062.99,2040.35 1135.83,2040.35 1186.02,1990.16 1186.02,1634.02 1134,1582 1134,1505.76 1155,1484.76 1155,1301 1185,1271 1185,1220.73 1184.8,1220.53 1184.8,1198.2 1248,1135 v1(1248,993)
NetJ5_28: J5.28 U9.30 | length 1471.9
  Top Layer w5: J5.28@162.8,1397.64 172.69,1397.64 204.72,1429.68 204.72,1561.02
  Top Layer w6: 146.65,1619.09 204.72,1561.02
  Top Layer w8: 146.65,1619.09 146.65,2056.1 275.2,2184.65 736.26,2184.65 800.24,2248.63 U9.30@833.13,2248.63
NetL5_1: L5.1 R46.2 | length 45.4
  Top Layer w5: R46.2@1355.44,2630.75 L5.1@1394.54,2630.75
  Top Layer w8: R46.2@1351,2635.19 R46.2@1355.44,2630.75
NetL5_4: L5.4 R43.2 | length 44.9
  Top Layer w5: R43.2@1354.25,2599.25 L5.4@1394.54,2599.25
  Top Layer w8: R43.2@1351,2596 R43.2@1354.25,2599.25
NetR2_2: R2.2 R3.2 | length 63
  Top Layer w30: R3.2@675.19,753.86 R2.2@675.19,816.85
NetR3_1: R3.1 R15.1 U1.10 | length 108
  Top Layer w7: 769.88,713.5 U1.10@796.46,713.5
  Top Layer w30: R3.1@728.74,753.86 728.74,713.55 769.84,713.55 769.88,713.5
NetR5_2: R5.2 U6.A2 | length 127.7
  Top Layer w5: v3(750,1247) 750,1247.28 U6.A2@762.57,1259.84
  Bottom Layer w5: v3(750,1247) 750,1268.51 791.49,1310 R5.2@821,1310
NetR6_2: R6.2 R15.2 | length 63
  Top Layer w30: R6.2@675.19,627.87 R15.2@675.19,690.86
NetR9_1: R9.1 U10.3 | length 70.5
  Top Layer w8: U10.3@335.61,1817.74 339.61,1821.74 R9.1@404.4,1821.74
NetR9_2: R9.2 R17.2 U6.J7 | length 436.8
  Top Layer w5: 621,1522 621,1478.18 U6.J7@634.61,1464.57
  Top Layer w6: R17.2@442.3,1782.74 442.3,1722.7 621,1544 621,1522
  Top Layer w8: R17.2@442.3,1782.74 R9.2@442.3,1821.74
NetR14_1: R14.1 U4.9 U6.J1 | length 598.9
  Top Layer w5: U6.J1@788.16,1464.57 812,1464.57 832.43,1485 970.71,1485 v3(985.24,1470.47)
  Top Layer w6: v3(1082.68,1212.6) 1108.1,1238.02 U4.9@1108.1,1258.5
  Bottom Layer w7: v3(985.24,1470.47) 985.24,1310.04 v3(1082.68,1212.6) 1082.68,1181.3 R14.1@1083.66,1180.32
NetR16_1: R16.1 U4.10 U6.J2 | length 665.7
  Top Layer w5: U6.J2@762.57,1464.57 769.63,1464.57 783.06,1478 806,1478 825,1497
  Top Layer w6: v3(1123.03,1206.69) 1127.79,1211.45 1127.79,1222.31 1127.65,1222.44 1127.65,1258.36 U4.10@1127.79,1258.5
  Top Layer w7: 825,1497 988.24,1497 v3(1014.76,1470.47)
  Bottom Layer w7: v3(1014.76,1470.47) 1014.76,1314.96 1057.09,1272.64 v3(1123.03,1206.69) 1122.68,1206.34 R16.1@1122.68,1180.32
NetR24_2: R24.2 S1.1 S1.2 | length 312.3
  Bottom Layer w8: R24.2@1104.33,186.71 1104.33,87.19 S1.2@1103.57,86.43 1173.85,86.43 1191.74,68.54 1212.26,68.54 1230.15,86.43 S1.1@1300.43,86.43
NetR25_2: R25.2 S2.1 S2.2 | length 313.9
  Bottom Layer w8: R25.2@457.68,189.66 457.57,189.56 S2.2@457.57,87.43 527.85,87.43 545.74,69.54 566.26,69.54 584.15,87.43 S2.1@654.43,87.43
NetU4_28: U4.28 U9.40 | length 1074.2
  Top Layer w8: U9.40@985.69,2155.13 985.69,2082.23 1001.97,2065.94 1060.04,2065.94 1102.36,2108.27 v3(1246.06,2108.27) ; v3(1177.17,1498.03) 1186.84,1488.35 U4.28@1186.84,1445.5
  Bottom Layer w8: v3(1177.17,1498.03) 1151.36,1523.83 1151.36,1570.65 1246.06,1665.35 v3(1246.06,2108.27)
NetU4_29: U4.29 U6.H2 | length 490.9
  Top Layer w5: U6.H2@762.57,1438.98 775.59,1452 815,1452 837,1474 955.57,1474 976.59,1452.97 1033.68,1452.97 1086.91,1506.2 1133.56,1506.2 1167.16,1472.61 U4.29@1167.16,1445.5
NetU4_32: U4.32 U6.J3 | length 448.6
  Top Layer w5: U6.J3@736.98,1464.57 751.15,1478.74 767.3,1478.74 773.99,1485.43 773.99,1497.48 795.01,1518.5 821,1518.5
  Top Layer w8: 821,1518.5 828.5,1511 1012.62,1511 v3(1037.4,1486.22) ; v3(1095.47,1487.2) 1108.1,1474.57 U4.32@1108.1,1445.5
  Bottom Layer w8: v3(1037.4,1486.22) 1094.49,1486.22 v3(1095.47,1487.2)
NetU6_J4: U6.J4 U9.1 | length 1083.8
  Top Layer w4: 725,1507 725,1522
  Top Layer w5: U6.J4@711.39,1464.57 725,1478.18 725,1507 ; 725,1522 725,1576.77 719.5,1582.27 719.5,1612.87 727,1620.37 ; v3(1042.32,2104.33) 1075.79,2104.33 1131.89,2160.43 1131.89,2183.07 1125.39,2189.57 U9.1@1098.87,2189.57
  Top Layer w6: 727,1620.37 v3(749.63,1643)
  Top Layer w7: v1(948.82,1667.32) 948.82,1687.79 950.99,1689.97 950.99,2034.65 v1(962.6,2046.26)
  Bottom Layer w5: v3(749.63,1643) 825,1643 849.32,1667.32
  Bottom Layer w7: 849.32,1667.32 v1(948.82,1667.32) ; v1(962.6,2046.26) 962.6,2073.82 993.11,2104.33 v3(1042.32,2104.33)
NetU6_K4: U6.K4 U9.39 | length 860.9
  Top Layer w5: U6.K4@711.39,1490.16 711.39,1531.74 709.33,1533.79 709.33,1576.88 708.5,1577.71 708.5,1632.5 746,1670 v3(769,1670)
  Top Layer w6: 966,2110.24 U9.39@966,2155.13
  Top Layer w7: v1(925.2,1698.82) 936.02,1709.65 936.02,2080.26 966,2110.24
  Bottom Layer w5: v3(769,1670) 824.41,1670 853.23,1698.82
  Bottom Layer w7: 853.23,1698.82 v1(925.2,1698.82)
NetU6_K6: U6.K6 U9.32 | length 1011.6
  Top Layer w5: U6.K6@660.2,1490.16 660.2,1494.7 660.5,1494.99 660.5,1507.01 660.2,1507.3 660.2,1522
  Top Layer w6: 660.2,1522 660.2,1568.69 517.72,1711.18 517.72,2068.9 620.46,2171.65 741.65,2171.65 779.26,2209.26 U9.32@833.13,2209.26
PB0: J6.10 U9.8 | length 543.1
  Top Layer w8: J6.10@673.92,2289 674.53,2288.39 v2(801.18,2288.39) ; U9.8@1098.87,2327.37 1118.37,2327.37 1121.82,2330.82 v3(1134.9,2330.82)
  Bottom Layer w8: v2(801.18,2288.39) 844.49,2288.39 866.57,2310.46 888.02,2310.46 900.23,2322.67 900.23,2338.32 914.06,2352.15 1111.85,2352.15 1133.18,2330.82 v3(1134.9,2330.82)
PB1: J6.1 U9.9 X18.3 | length 1342.2
  Top Layer w6: J6.1@513.91,2489.17 513.91,2538.51 544,2568.61 544,2701 X18.3@592,2749 646,2803 1058.77,2803 1180.28,2681.49 1180.28,2393.28 1136.82,2349.82 1126.95,2349.82 1124.18,2347.05 U9.9@1098.87,2347.05
  Top Layer w7: J6.1@513.91,2489.17 J6.1@514.08,2489
PB2: J6.3 U9.10 X18.4 | length 1353.3
  Top Layer w6: J6.3@514.08,2439 579.75,2439 592.2,2451.45 592.2,2648.8 X18.4@592,2649 651,2708 651,2768.64 672.36,2790 1053.38,2790 1165.43,2677.95 1165.43,2399.43 1132.74,2366.74 U9.10@1098.87,2366.74
PB3: J6.5 U9.11 X18.1 | length 1312.5
  Top Layer w6: J6.5@514.08,2389 574.31,2389 608,2422.69 608,2518 644,2554 644,2674 665,2695 665,2722 X18.1@692,2749 720,2777 1048,2777 1152,2673 1152,2405 1133.43,2386.43 U9.11@1098.87,2386.43
PCKIN: C52.1 J3.6 U6.B7 | length 1195.7
  Top Layer w4: v2(645,1275) v2@646.65,1273.35
  Top Layer w5: U6.B7@634.61,1285.43 v2(645,1275) ; 646.65,1225 v2@646.65,1273.35
  Top Layer w6: v1(646.65,1186.02) 646.65,1225 ; J3.6@820.92,1884.43 821.49,1883.86 880.91,1883.86 906.5,1858.27 906.5,1733.86 887.2,1714.56 887.2,1683.08 888.78,1681.5 v1(888.78,1639.76)
  Bottom Layer w5: v2(645,1275) C52.1@645,1295.3
  Bottom Layer w6: v1(646.65,1186.02) 675.2,1157.48 826.77,1157.48 916.34,1247.05 916.34,1577.76 930.12,1591.54 930.12,1621.06 911.42,1639.76 v1(888.78,1639.76)
PD2: J6.2 U9.20 | length 275.4
  Top Layer w6: J6.2@673.92,2489 739.35,2489 749.35,2479 873,2479 906.95,2445.05 U9.20@906.95,2420.87
PD3: J6.4 U9.21 | length 256.8
  Top Layer w6: J6.4@673.92,2439 738.21,2439 765.21,2466 865.26,2466 887.26,2444 U9.21@887.26,2420.87
PD4: J6.6 U9.25 | length 176.6
  Top Layer w8: J6.6@673.92,2389 741.91,2389 783.85,2347.05 U9.25@833.13,2347.05
PD6: J6.8 U9.26 | length 164
  Top Layer w8: J6.8@673.92,2339 760.41,2339 772.04,2327.37 U9.26@833.13,2327.37
PWR_BTN: D2.A R20.1 R25.1 U9.33 | length 3686.2
  Top Layer w7: v1(793.31,2176.18) 806.7,2189.57 U9.33@833.13,2189.57
  Bottom Layer w7: R25.1@457.68,227.56 R20.1@537.4,227.56 1073.43,227.56 1090.97,245.11 1117.69,245.11 1124.69,238.11 1129.2,238.11 1131.89,240.8 1155.51,240.8 1158.2,238.11 1163.7,238.11 1170.7,245.11 1197.41,245.11 1204.41,238.11 1273.15,238.11 1636.81,601.77 1636.81,1714.57 1470.47,1880.91 1470.47,1979.33 1228.35,2221.46 1111.14,2221.46 1065.87,2266.73 862.2,2266.73 793.31,2197.83 v1(793.31,2176.18)
RESET: D13.A R19.1 R24.1 U9.13 X18.5 | length 3914.9
  Top Layer w6: v1(731.3,2698.82) 796.26,2763.78 1042.84,2763.78 1117.13,2689.49 1117.13,2520.74 v3(1050.25,2453.86) 1044.74,2448.35 U9.13@1044.74,2420.87
  Bottom Layer w7: X18.5@492,2749 542.18,2698.82 v1(731.3,2698.82)
  Bottom Layer w8: v3(1050.25,2453.86) 1154.9,2349.21 1154.9,2271.02 1189.96,2235.96 1234.35,2235.96 1483.97,1986.34 1483.97,1887.91 1651.31,1720.57 1651.31,597.18 1278.74,224.61 R24.1@1104.33,224.61 R19.1@1184.06,224.61
RESET_TOUCH: R23.1 U9.22 U11.4 | length 752.1
  Top Layer w6: v3(837.46,2439) 849.46,2451 857.57,2451 867.57,2441 U9.22@867.57,2420.87
  Bottom Layer w7: v3(837.46,2439) 876.5,2478.04 876.5,2491.88 896.12,2511.5 923.88,2511.5 933.02,2502.36
  Bottom Layer w8: 933.37,2502.71 933.52,2502.86 1104.35,2502.86 1276.6,2675.1 R23.1@1314,2675.1 1346.98,2642.13 U11.4@1403.54,2642.13
UC_N: D27.1 D27.6 J2.2 L5.3 TP1.TP | length 202.2
  Top Layer w5: L5.3@1461.47,2599.25 1472.76,2599.25 1483.52,2588.5 1510.98,2588.5 1517.42,2594.95 ; 1517.83,2595.32 D27.6@1525.73,2595.32 D27.1@1552.29,2595.32 1561.55,2595.32 1567.42,2589.45 1588.58,2589.45 1602.54,2603.41 J2.2@1648.7,2603.41
UC_P: D27.3 D27.4 J2.3 L5.2 TP4.TP | length 201.9
  Top Layer w5: L5.2@1461.47,2630.75 1473.75,2630.75 1483.5,2640.5 ; 1483.5,2641.5 1511.5,2641.5 1511.5,2640.98 1517.24,2635.24 ; 1517.42,2635.42 1517.24,2635.24 ; J2.3@1648.7,2629 1600.13,2629 1588.58,2640.55 1567.42,2640.55 1561.55,2634.69 D27.3@1552.29,2634.69 D27.4@1525.73,2634.69 1525.18,2635.24 1517.24,2635.24
UD_N: R43.1 U9.3 | length 571.6
  Top Layer w5: U9.3@1098.87,2228.94 1121.11,2228.94 1124.45,2232.29 1220.29,2232.29 1247,2259 1247,2591 1265.09,2609.09 1283.51,2609.09 1296.6,2596 R43.1@1313.1,2596
UD_P: R46.1 U9.4 | length 571.6
  Top Layer w5: U9.4@1098.87,2248.63 1121.11,2248.63 1124.45,2245.29 1214.9,2245.29 1234,2264.38 1234,2596.38 1259.71,2622.09 1283.51,2622.09 1296.6,2635.19 R46.1@1313.1,2635.19
UGND: C48.2 D3.A D27.2 J2.5 L4.2 R44.1 TP3.TP U9.5 | length 1249.7
  Top Layer w8: U9.5@1098.87,2268.31 v3(1200.79,2268.31) ; D27.2@1552.29,2615 v5(1578,2615)
  Top Layer w12: v1(1551,2405) 1551.91,2404.09 L4.2@1599,2404.09 1599,2427.58 1622.42,2451 1653,2451 ; v1(1592,2680) 1593,2679 1599,2679 1600.18,2680.18 J2.5@1648.7,2680.18 1690.82,2680.18 1698,2673 1698,2496 1667,2465 ; D3.A@1653,2426.72 1653,2451 ; C48.2@1744,2390 1716.1,2390 1716,2390.1 R44.1@1701,2390.1 1700,2390.1 1688.17,2401.93 1688.17,2404 1686.19,2404 1676,2414.19 1676,2456 1667,2465 ; 1653,2451 1667,2465
  Bottom Layer w12: v3(1200.79,2268.31) 1413.69,2268.31 1414,2268 v1(1551,2405) ; v5(1578,2615) 1592,2629 v1(1592,2680)
USBSHIELD: C48.1 J2.6 J2.7 J2.8 J2.9 J2.10 J2.11 R44.2 | length 632
  Top Layer w12: R44.2@1701,2428 1728.7,2428 1729,2427.7 C48.1@1744,2427.7 1744,2453 1755,2464 J2.6@1755,2491.2 J2.10@1755,2589.63 J2.11@1755,2668.37 J2.7@1755,2766.8
  Bottom Layer w12: J2.8@1648.7,2530.57 1677.1,2530.57 1716.47,2491.2 J2.6@1755,2491.2 ; J2.9@1648.7,2727.43 1675.26,2727.43 1714.63,2766.8 J2.7@1755,2766.8
pads on no net: H1. H1.1 H2. H2.1 H3. H3.1 H4. H4.1 J1.14 J2.4 J5.6 J5.P1 J5.P2 J5.P3 S1.6 S1.7 S2.6 S2.7 U4.16 U4.30 U4.31 U6.G5 U7.4 U8.4 U9.27 U9.28 U9.29 U9.31 U9.36 U9.37 U9.38
copper on no net:
  other v5: 162,75.45 1637,82.45 71.45,166 252.55,166 1546.45,173 1727.55,173 162,256.55 1637,263.55 1657,1871.45 1566.45,1962 1747.55,1962 1657,2052.55 1766.31,2343 184,2606.45 93.45,2697 274.55,2697 184,2787.55

## Polygon pours and split planes (outlines as drawn)
NetJ1_20 on Top Layer "Std" (solid, pour order 2): 1789.37,929.13 1789.37,1610.24 1473.43,1610.24 1473.43,1489.17 1566.93,1489.17 1566.93,1070.87 1473.43,1070.87 1473.43,929.13
USBSHIELD on Top Layer "DirectConnect" (solid, pour order 3): 1636.83,2471.46 1636.83,2476.39 1636.83,2786.54 1787.28,2786.54 1787.4,2471.46
GND on Top Layer "GND-LCD" (solid, pour order 4): 91.57,1198.18 163.03,1198.18 163.03,1454.09 91.57,1454.09
GND on Bottom Layer "Std" (solid, pour order 5): 626.98,1542 837,1542 858,1563 858,1599 843,1614 674,1614 626.98,1566.98
GND on GND (split plane): 1738.86,2853.64 1745.35,2852.54 1751.68,2850.71 1757.77,2848.19 1763.53,2845.01 1768.9,2841.2 1773.81,2836.81 1778.2,2831.9 1782.01,2826.52 1785.2,2820.76 1787.72,2814.68 1789.54,2808.35 1790.65,2801.85 1790.98,2795.85 1790.93,2795.28 1790.93,78.74 1790.98,78.16 1790.65,72.16 1789.54,65.67 1787.72,59.34 1785.2,53.26 1782.01,47.49 1778.2,42.12 1773.81,37.21 1768.9,32.82 1763.53,29.01 1757.77,25.82 1751.68,23.3 1745.35,21.48 1738.86,20.38 1732.86,20.04 1732.28,20.1 20.1,20.1 20.1,2853.92 1732.28,2853.92 1732.86,2853.98
1.2V on Supply (split plane): 1057.93,1682.79 982.12,1606.98 926.12,1550.98 925.23,1549.66 924.92,1548.09 924.92,986.08 449.08,986.08 449.08,1633 448.77,1634.56 447.88,1635.88 446.56,1636.77 445,1637.08 313.08,1637.08 313.08,1730.17 1057.93,1730.17
3.3V on Supply (split plane): 1738.86,2853.64 1745.35,2852.54 1751.68,2850.71 1757.77,2848.19 1763.53,2845.01 1768.9,2841.2 1773.81,2836.81 1778.2,2831.9 1782.01,2826.52 1785.2,2820.76 1787.72,2814.68 1789.54,2808.35 1790.65,2801.85 1790.98,2795.85 1790.93,2795.28 1790.93,78.74 1790.98,78.16 1790.65,72.16 1789.54,65.67 1787.72,59.34 1785.2,53.26 1782.01,47.49 1778.2,42.12 1773.81,37.21 1768.9,32.82 1763.53,29.01 1757.77,25.82 1751.68,23.3 1745.35,21.48 1738.86,20.38 1732.86,20.04 1732.28,20.1 20.1,20.1 20.1,977.92 441.23,977.92 442.79,978.23 443.12,978.45 443.44,978.23 445,977.92 929,977.92 930.56,978.23 931.88,979.12 932.77,980.44 933.08,982 933.08,1546.41 987.88,1601.21 1064.89,1678.22 1065.78,1679.54 1066.09,1681.1 1066.09,1734.25 1065.78,1735.81 1064.89,1737.14 1063.57,1738.02 1062.01,1738.33 309,1738.33 307.44,1738.02 306.12,1737.14 305.23,1735.81 304.92,1734.25 304.92,1637.08 20.1,1637.08 20.1,2853.92 1732.28,2853.92 1732.86,2853.98
1.8V on Supply (split plane): 440.92,986.08 20.1,986.08 20.1,1628.92 440.92,1628.92

## Other copper
Supply (plane layer: these items are gaps in the copper):
  lines w8: 0,982 441.23,982 ; 0,1633 445,1633 445,982 929,982 929,1548.09 985,1604.09 1062.01,1681.1 1062.01,1734.25 309,1734.25 309,1633 276,1633

## Silkscreen, mask and mechanical layers (free items; w line width, h text height)
Top Overlay:
  lines w8: 0,1535.43 217.32,1535.43
  lines w10: 0,1535.43 0,1102.36 217.32,1102.36 217.32,1535.43
Bottom Overlay:
  text "RST" at 636.3,2183.26 h32 r270
Mechanical 1:
  the board outline again, w0.5
Mechanical 2:
  text "NOTES (UNLESS SPECIFIED OTHERWISE)" at 2497.57,6903.57 h80
  text "1. FABRICATE PCB IN ACCORDANCE WITH IPC-A-600 CLASS 2 (LATEST REVISION)" at 2596,6608.3 h80
  text "2. THE PCB MUST BE LEAD FREE ASSEMBLY PROCESS COMPATIBLE." at 2596,6313.02 h80
  text "MUST HANDLE MINIMUM 6 CYCLES - 260C FOR 10 SECONDS." at 2791,6157 h80
  text "3. LAMINATE AND PREPREG TO BE FR4 TG170" at 2596,5919.32 h80
  text "4. PLATING FINISH - BOTH SIDES ENIG GOLD PLATED" at 2596,5624.05 h80
  text "5. SOLDERMASK - BOTH SIDES GREEN" at 2596,5328.77 h80
  text "6. SOLDER SAMPLES TO BE PROVIDED" at 2596,5033.5 h80
  text "7. FINISHED PCB MUST BE MANELIZED FOR ASSEMBLY." at 2596,4738.22 h80
  text "8. SILKSCREEN - WHITE EPOXY INK, BOTH SIDES. NO SILK ON PADS" at 2596,4452.39 h80
  text "9. SUPPLIER MARKING - ON SOLDER SIDE" at 2596,4157.12 h80
  text "ADD ROHS LOGO" at 2792.85,3960.27 h80
  text "ADD UL MARKING AND ID" at 2792.85,3763.42 h80
  text "10. LAYER STACKUP - SEE DETAIL A" at 2596,3468.14 h80
  text "DETAIL A" at 2546,2862 h90
  text "File" at 2726,2712 h60
  text "GTO" at 2735.8,2578.26 h60
  text "GTS" at 2735.8,2458.26 h60
  text "GTL" at 2735.8,2338.26 h60
  text "GP1" at 2735.8,2098.26 h60
  text "GP2" at 2735.8,1858.26 h60
  text "GBL" at 2735.8,1638.26 h60
  text "GBS" at 2735.8,1498.26 h60
  text "Do not handcuff the fabricator. Do not handcuff the fabricator. Tell the Tell them what impedance value m what impedance value you are targeting you are targeting with what line widths and leave with what line widths and leave the rest to them. On your print the rest to them. On your prints, please specify the s, please specify the pitch or edge pitch or edge-edge spacing for diff pairs. Allo edge spacing for diff pairs. Allow them to modify the dielectri w them to modify the dielectrics/lines cs/lines as needed for their processes to as needed for their processes to achieve the required impedance achieve the required impedance by placing a note on by placing a note on the fabrication drawing a the fabrication drawing allowing this. Remember, they are the o llowing this. Remember, they are the ones responsible for nes responsible for meeting the required impedance." at 2515,1249 h60